# EAGLE board X16-Power-Slab (EAGLE 9.6.2)

Size 152.4 x 63.5 mm. Coordinates in mm from the lower left corner, seen from the top.
Outline: 0,0 152.4,0 152.4,63.5 0,63.5 0,0
Copper layers (1*16): Top 0.035mm / dielectric 1.5mm / Bottom 0.035mm
Design rules "default": minimum track width 6mil, minimum drill 0.35mm, track to track 6mil, track to pad 6mil, pad to pad 6mil, via to via 6mil, smd to smd 6mil, copper to edge 40mil, drill to drill 6mil, minimum pad ring 10mil, minimum via ring 8mil, stop-mask expansion 4mil, vias tented up to drill 0mil, thermal gap 10mil

## Footprints (pad centres in the part's own frame; a part is rotated, then mirrored left to right if it is on the bottom)
0603 = smd 1.1 x 1: 1 -0.85,0; 2 0.85,0
0603-POLAR = smd 1.1 x 1: + 0.85,0; - -0.85,0
SOD-323 = smd 0.63 x 0.83: A 1.15,0; C -1.15,0
LED-0603 = smd 1 x 1: A -0.877,0; C 0.877,0
DO214AC = smd 1.8 x 1.7: A 2.05,0; C -2.05,0
CONN_796636-3 = drill 1.524 pad 2.032: 1 0,0; 2 5.08,0; 3 10.16,0
SAMTEC_ET60T-D04-3-08-D04-X-R1-S = drill 1.02 square: 01 -8.71,-3.5 | drill 1.02: 02 -6.17,-3.5; 03 -3.63,-3.5; 04 -1.09,-3.5; 05 1.45,-3.5; 06 3.99,-3.5; 07 6.53,-3.5; 08 9.07,-3.5; 09 -8.71,-0.96; 10 -6.17,-0.96; 11 -3.63,-0.96; 12 -1.09,-0.96; 13 1.45,-0.96; 14 3.99,-0.96; 15 6.53,-0.96; 16 9.07,-0.96; 17 -8.71,1.58; 18 -6.17,1.58; 19 -3.63,1.58; 20 -1.09,1.58; 21 1.45,1.58; 22 3.99,1.58; 23 6.53,1.58; 24 9.07,1.58; P01_1 -33.38,5; P01_2 -33.38,2.5; P01_3 -33.38,0; P01_4 -33.38,-2.5; P01_5 -33.38,-5; P01_6 -30.38,-5; P01_7 -30.38,-2.5; P01_8 -30.38,0; P01_9 -30.38,2.5; P01_10 -30.38,5; P02_1 -27.88,5; P02_2 -27.88,2.5; P02_3 -27.88,0; P02_4 -27.88,-2.5; P02_5 -27.88,-5; P02_6 -24.88,-5; P02_7 -24.88,-2.5; P02_8 -24.88,0; P02_9 -24.88,2.5; P02_10 -24.88,5; P03_1 -22.38,5; P03_2 -22.38,2.5; P03_3 -22.38,0; P03_4 -22.38,-2.5; P03_5 -22.38,-5; P03_6 -19.38,-5; P03_7 -19.38,-2.5; P03_8 -19.38,0; P03_9 -19.38,2.5; P03_10 -19.38,5; P04_1 -16.88,5; P04_2 -16.88,2.5; P04_3 -16.88,0; P04_4 -16.88,-2.5; P04_5 -16.88,-5; P04_6 -13.88,-5; P04_7 -13.88,-2.5; P04_8 -13.88,0; P04_9 -13.88,2.5; P04_10 -13.88,5; P05_1 13.88,5; P05_2 13.88,2.5; P05_3 13.88,0; P05_4 13.88,-2.5; P05_5 13.88,-5; P05_6 16.88,-5; P05_7 16.88,-2.5; P05_8 16.88,0; P05_9 16.88,2.5; P05_10 16.88,5; P06_1 19.38,5; P06_2 19.38,2.5; P06_3 19.38,0; P06_4 19.38,-2.5; P06_5 19.38,-5; P06_6 22.38,-5; P06_7 22.38,-2.5; P06_8 22.38,0; P06_9 22.38,2.5; P06_10 22.38,5; P07_1 24.88,5; P07_2 24.88,2.5; P07_3 24.88,0; P07_4 24.88,-2.5; P07_5 24.88,-5; P07_6 27.88,-5; P07_7 27.88,-2.5; P07_8 27.88,0; P07_9 27.88,2.5; P07_10 27.88,5; P08_1 30.38,5; P08_2 30.38,2.5; P08_3 30.38,0; P08_4 30.38,-2.5; P08_5 30.38,-5; P08_6 33.38,-5; P08_7 33.38,-2.5; P08_8 33.38,0; P08_9 33.38,2.5; P08_10 33.38,5 | hole 3.2: 38.88,0; -38.88,0
0806 = smd 0.8 x 1.8: 1 -0.9,0; 2 0.9,0
LINEAR_AZ1117CR-3.3TRG1 = smd 1.2 x 1.6: 1 -2.3,-3.2; 2 0,-3.2; 3 2.3,-3.2 | smd 3.3 x 1.6: 4 0,3.2
CONN_BMR480_BRICK = drill 1.6 pad 2: PIN1 4.06,26.52; PIN2 4.06,18.9; PIN3 4.06,11.28; PIN4 54.86,7.47; PIN5 54.86,11.28; PIN7 54.86,26.52; PIN8 54.86,30.33 | drill 0.6: PIN9 57.4,12.855; PIN10 57.4,14.861; PIN11 57.4,16.868; PIN12 57.4,18.875; PIN13 57.4,20.881; PIN14 57.4,22.888; PIN15 57.4,24.894; PMBUS_SA2 57.4,20.881; PMBUS_SA3 57.4,20.881
BUCK,LM2679SX-ADJ = smd 2.16 x 0.91: PIN1 0,-7.62; PIN2 0,-6.35; PIN3 0,-5.08; PIN4 0,-3.81; PIN5 0,-2.54; PIN6 0,-1.27; PIN7 0,0 | smd 10.918 x 10.8: PIN8 -10.195,-3.81
3.3V_TESTPOINT = drill 4.572 pad 6.35: 3.3V 0,0
5.2V_TESTPOINT = drill 4.572 pad 6.35: 5.2V 0,0
12V_TESTPOINT = drill 4.572 pad 6.35: 12V 0,0

## Placement (x,y rotation side)
C2  0.01uF  [0603]  -0.85,-283.21 0 top  (outside the outline)
C3  10uF  [0603]  -80.01,-234.95 0 top  (outside the outline)
C4  22uF  [0603]  -80.01,-238.76 0 top  (outside the outline)
C5  0.1uF  [0603]  -80.01,-242.57 0 top  (outside the outline)
C10  0.1uF  [0603]  -80.01,-246.38 0 top  (outside the outline)
C11  0.1uF  [0603]  -80.01,-250.19 0 top  (outside the outline)
CIN1  180uF  [0603-POLAR]  -80.01,-213.36 0 top  (outside the outline)
CIN2  0.47uF  [0603]  -0.85,-270.51 0 top  (outside the outline)
COUT1  150uF  [0603-POLAR]  -80.01,-201.93 0 top  (outside the outline)
COUT2  150uF  [0603-POLAR]  -80.01,-205.74 0 top  (outside the outline)
COUT3  150uF  [0603-POLAR]  -80.01,-209.55 0 top  (outside the outline)
D1  3.6V  [SOD-323]  -80.01,-254 0 top  (outside the outline)
D2  12V  [LED-0603]  10.16,38.1 0 top
D3  5.2V  [LED-0603]  10.16,34.29 0 top
D4  3.3V  [LED-0603]  10.16,30.48 0 top
DIODE  40V  [DO214AC]  -78.74,-229.87 0 top  (outside the outline)
J1  CONN_796636-3  [CONN_796636-3]  24.13,-62.23 0 top  (outside the outline)
J2  CONN_796636-3  [CONN_796636-3]  24.13,-100.33 0 top  (outside the outline)
J3  CONN_ET60T  [SAMTEC_ET60T-D04-3-08-D04-X-R1-S]  44.45,-144.78 0 top  (outside the outline)
L1  15uH  [0806]  -81.28,-196.85 0 top  (outside the outline)
R1  1k  [0603]  -80.01,-217.17 0 top  (outside the outline)
R2  3.32k  [0603]  -80.01,-220.98 0 top  (outside the outline)
R3  12.4k  [0603]  -80.01,-224.79 0 top  (outside the outline)
R4  [0603]  -80.01,-257.81 0 top  (outside the outline)
R5  600  [0603]  3.81,38.1 0 top
R6  300  [0603]  3.81,34.29 0 top
R7  200  [0603]  3.81,30.48 0 top
U1  LINEAR_AZ1117CR-3.3TRG1DIODES_AZ1117CH-3.3TRG1_0_0  [LINEAR_AZ1117CR-3.3TRG1]  -3.81,-176.53 0 top  (outside the outline)
U$1  CONN_BMR480_BRICK  [CONN_BMR480_BRICK]  1.27,-41.91 0 top  (outside the outline)
U$2  BUCK_LM2679SX-ADJ  [BUCK,LM2679SX-ADJ]  16.51,-171.45 0 top  (outside the outline)
U$3  [3.3V_TESTPOINT]  31.75,31.75 0 top
U$4  [5.2V_TESTPOINT]  31.75,21.59 0 top
U$5  [12V_TESTPOINT]  31.75,11.43 0 top

## Library data of the parts
C2 CIN2 = SparkFun-Capacitors; PROD_ID: CAP-00810; VALUE: 0.1uF
C3-C5 C10 C11 = SparkFun-Capacitors; PROD_ID: CAP-00810
CIN1 COUT1-COUT3 = SparkFun-Capacitors; PROD_ID: CAP-13210
D1 = SparkFun-DiscreteSemi; PROD_ID: DIO-08199
D2-D4 = SparkFun-LED
DIODE U$3-U$5 = X15-Conversion-Parts-Library
J1 J2 = X16_Power_Slab; COPYRIGHT: Copyright (C) 2022 Ultra Librarian. All rights reserved.; DIGI-KEY_PART_NUMBER_1: A98423-ND; MANUFACTURER_PART_NUMBER: 796636-3; MFR_NAME: TE Connectivity
J3 = X16_Power_Slab; MANUFACTURER: Samtec; MAXIMUM_PACKAGE_HEIGHT: 10.0 mm; PARTREV: J; STANDARD: Manufacturer Recommendations
L1 = SparkFun-Coils; PROD_ID: NDUC-14257
R1-R7 = SparkFun-Resistors
U1 = X16_Power_Slab; AVAILABILITY: In Stock; DESCRIPTION: Linear Voltage Regulator IC Positive Fixed 1 Output 1A SOT-223-3; MF: Diodes Inc.; MP: AZ1117CH-3.3TRG1; PACKAGE: SOT-223 Diodes Inc.; PRICE: None; PURCHASE-URL: https://pricing.snapeda.com/search/part/AZ1117CH-3.3TRG1/?ref=eda
U$1 U$2 = X16_Power_Slab

## Nets
5.2V/2.1A: COUT1.+ COUT2.+ COUT3.+ L1.2 R2.2
12V/2.1A: CIN1.+ CIN2.1 U$2.PIN2
48V: J1.1 J1.2 J1.3
GND: J2.1 J2.2 J2.3 R1.2
GND/2.2D: CIN1.- CIN2.2 COUT1.- COUT2.- COUT3.- DIODE.A R3.1 U$2.PIN4 U$2.PIN8
N$1: C2.1 U$2.PIN3
N$2: C2.2 DIODE.C L1.1 U$2.PIN1
N$3: C3.1 U1.3
N$4: R1.1 R2.1 U$2.PIN6
N$5: U1.1
N$6: C4.1 U1.2 U1.4
N$7: C3.2
N$8: R3.2 U$2.PIN5
N$9: C4.2
N$10: U$1.PIN5
N$11: U$1.PIN4
N$12: U$1.PIN8
N$13: U$1.PIN7
N$14: U$1.PIN3
N$15: U$1.PIN1
N$16: C5.1 C10.1 C11.1
N$17: C5.2 C10.2 C11.2
P01: J3.P01_1 J3.P01_2 J3.P01_3 J3.P01_4 J3.P01_5 J3.P01_6 J3.P01_7 J3.P01_8 J3.P01_9 J3.P01_10
P02: J3.P02_1 J3.P02_2 J3.P02_3 J3.P02_4 J3.P02_5 J3.P02_6 J3.P02_7 J3.P02_8 J3.P02_9 J3.P02_10
P03: J3.P03_1 J3.P03_2 J3.P03_3 J3.P03_4 J3.P03_5 J3.P03_6 J3.P03_7 J3.P03_8 J3.P03_9 J3.P03_10
P04: J3.P04_1 J3.P04_2 J3.P04_3 J3.P04_4 J3.P04_5 J3.P04_6 J3.P04_7 J3.P04_8 J3.P04_9 J3.P04_10
P05: J3.P05_1 J3.P05_2 J3.P05_3 J3.P05_4 J3.P05_5 J3.P05_6 J3.P05_7 J3.P05_8 J3.P05_9 J3.P05_10
P06: J3.P06_1 J3.P06_2 J3.P06_3 J3.P06_4 J3.P06_5 J3.P06_6 J3.P06_7 J3.P06_8 J3.P06_9 J3.P06_10
P07: J3.P07_1 J3.P07_2 J3.P07_3 J3.P07_4 J3.P07_5 J3.P07_6 J3.P07_7 J3.P07_8 J3.P07_9 J3.P07_10
P08: J3.P08_1 J3.P08_2 J3.P08_3 J3.P08_4 J3.P08_5 J3.P08_6 J3.P08_7 J3.P08_8 J3.P08_9 J3.P08_10

## Tracks (layer width: path | path; a pad name or v marks a point on that pad's centre or on a via)
5.2V/2.1A  (4 unrouted)
12V/2.1A  (2 unrouted)
48V  (2 unrouted)
GND  (3 unrouted)
GND/2.2D  (8 unrouted)
N$1  (1 unrouted)
N$2  (3 unrouted)
N$3  (1 unrouted)
N$4  (2 unrouted)
N$6  (2 unrouted)
N$8  (1 unrouted)
N$16  (2 unrouted)
N$17  (2 unrouted)
P01  (9 unrouted)
P02  (9 unrouted)
P03  (9 unrouted)
P04  (9 unrouted)
P05  (9 unrouted)
P06  (9 unrouted)
P07  (9 unrouted)
P08  (9 unrouted)